# Altium PCB MGMEZZ04.PcbDoc (part 6 of 9)
Units mil, origin at the board's own origin, x right, y up, seen from the top; angles counter-clockwise.
Board outline 3790 x 5472.44 mil, 10 copper layers (TopLayer, InternalPlane1, MidLayer1, InternalPlane2, MidLayer2, MidLayer3, InternalPlane3, MidLayer4, InternalPlane4, BottomLayer), stack 57.08 mil thick; 846 components, 745 nets, 3323 pads, 1906 vias.
Unrouted connection lines stored in the file: 128.
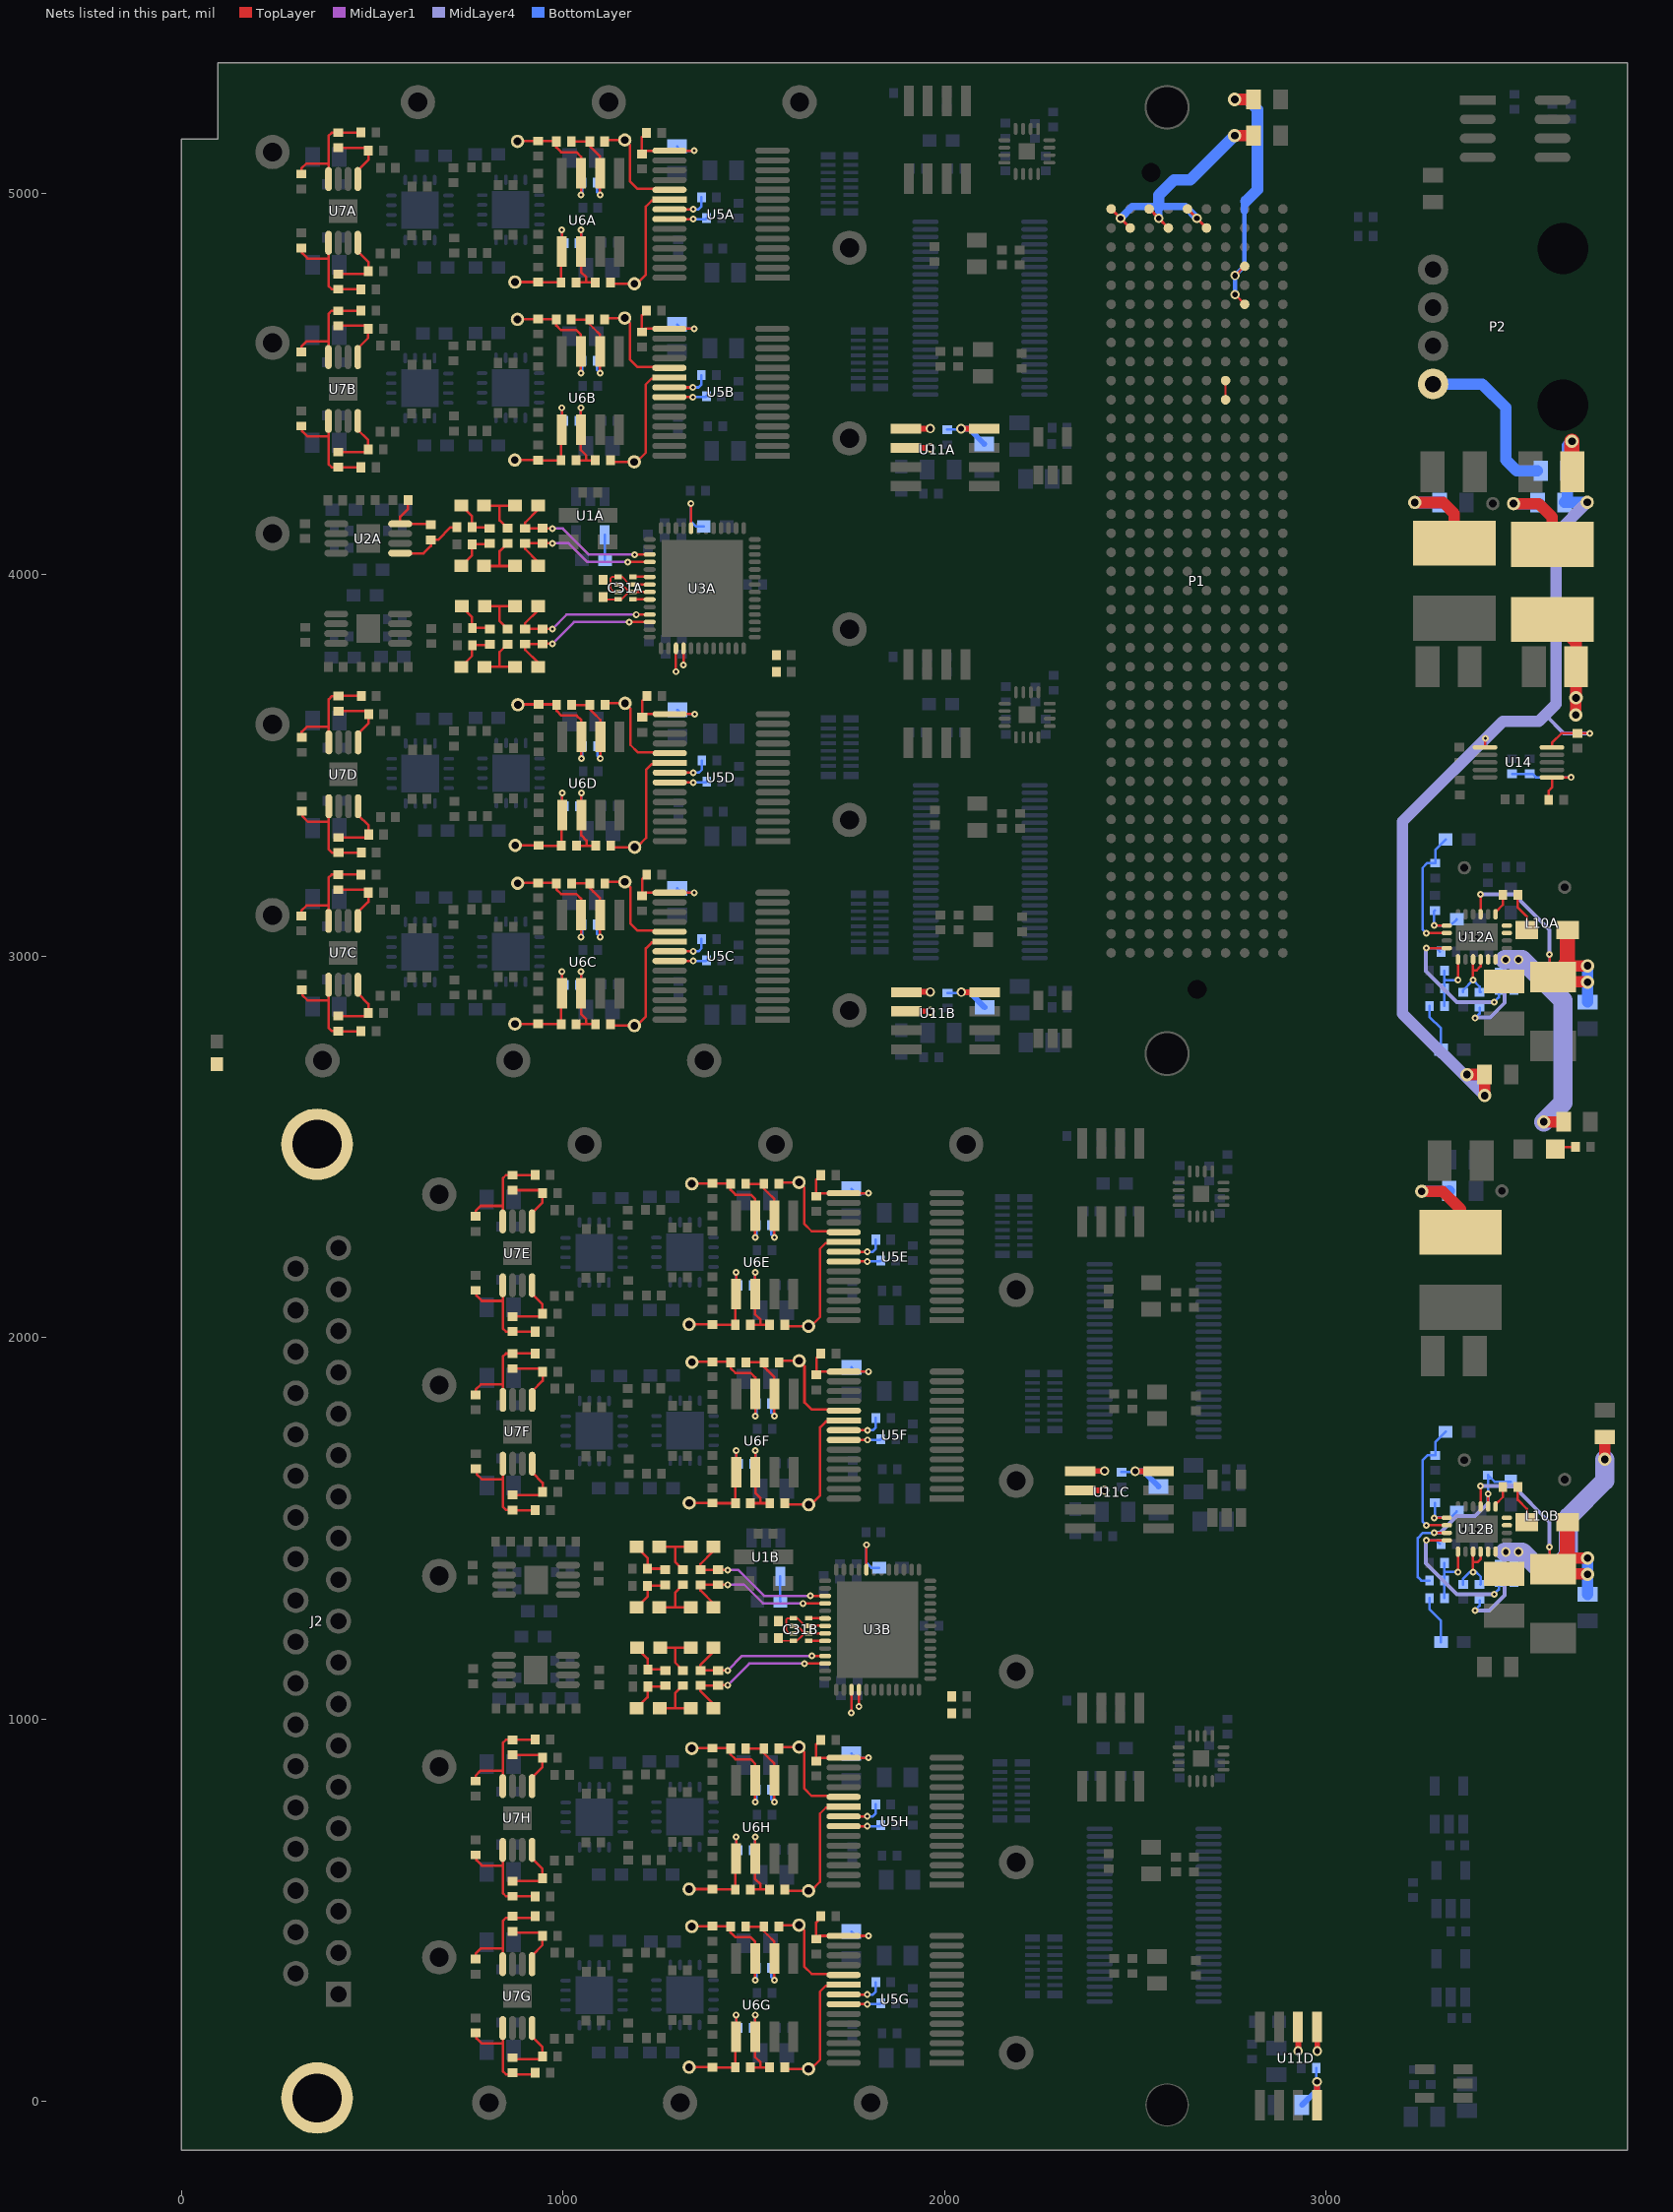
[diagram p14: the nets of this part, all layers, seen from the top]

## Via types
v1: diameter 18, hole 8, TopLayer to BottomLayer, 1296 vias
v2: diameter 18, hole 8, TopLayer to BottomLayer, tented both sides, 203 vias
v3: diameter 19.68, hole 7.87, TopLayer to BottomLayer, 188 vias
v4: diameter 25, hole 15, TopLayer to BottomLayer, tented both sides, 99 vias
v5: diameter 25, hole 15, TopLayer to BottomLayer, 72 vias
v6: diameter 35, hole 20, TopLayer to BottomLayer, 48 vias

## Nets (pads, with @x,y where several pads share a name; then routed paths per layer and width w, separated by ;. In a path a pad name is that pad's centre, name@x,y a point inside that pad or via, vN(x,y) a via of type N, cw(c..) or ccw(c..) an arc to the next point about the centre after c; other vN are vias at no path point) (continued)
N5V5FILT: C55A.2 C55B.2 C55C.2 C55D.2 C82.1 L13.1 R47A.2 R47B.2 R47C.2 R47D.2 U11A.1 U11A.2 U11A.8 U11B.1 U11B.2 U11B.8 U11C.1 U11C.2 U11C.8 U11D.1 U11D.2 U11D.8 | length 1510.9
  TopLayer w15: U11A.2@1899.38,4332.62 v5(1962.61,4332.62) ; U11A.1@1899.38,4383.19 v5(1962.61,4383.19) ; U11B.2@1900.19,2855.95 v5(1962.43,2855.95) ; U11B.1@1905.76,2906.53 v5@1964,2906.53 ; v5@2040.9,4382.62 U11A.8@2104.38,4382.62 ; v5(2043.96,2905.95) U11B.8@2105.19,2905.95 ; U11C.1@2355.88,1650.88 v5(2419.12,1650.88) ; U11C.2@2360.76,1600.31 v5@2419,1600.31 ; v5@2497.4,1650.31 U11C.8@2560.88,1650.31 ; v5@2927.28,129.91 U11D.2@2927.28,188.15 ; U11D.8@2976.14,-11.31 v5(2976.14,49.93) ; v5@2976.72,133.46 U11D.1@2976.72,196.69
  TopLayer w30: L13.1@3592.3,3883.15 3654.67,3820.78 C82.1@3654.67,3759.14 v6(3654.67,3677.26) ; v6@3654,3633.11 C82.1@3654,3714.99
  BottomLayer w6.5: R47A.2@2007,4380.37 v5@2043.9,4380.37 ; R47B.2@2007.81,2903.71 v5@2044.71,2903.71 ; v5@2040.9,4380.37 v5(2043.14,4382.62) ; R47C.2@2463.5,1648.06 v5@2497.4,1648.06 ; v5@2973.9,49.18 R47D.2@2973.9,86.07 ; v5@2973.9,52.18 v5(2976.14,49.93)
  BottomLayer w15: v5@2043.96,2903.71 2046.2,2905.95 2065.2,2905.95 C55B.2@2104.81,2866.34 ; v5@2046.14,4382.62 2064.38,4382.62 C55A.2@2104,4343 ; v5(2499.65,1650.31) 2520.89,1650.31 C55C.2@2560.5,1610.69 ; C55D.2@2936.53,-10.93 2976.14,28.69 v5(2976.14,49.93)
  other v5: 2926.14,130.46 2976.72,130.46 2419.12,1600.31 1962.43,2906.53
  other v6: 3654,3632.91
N5V5INT: C72.2 C81.1 In1.1 R49A.2 R75.1 R76.1 U14.5 U14.6 | length 2605.7
  TopLayer w6.5: U14.6@3416.39,3547.61 3416.39,3569.87 v1(3417.5,3570.98) ; U14.5@3591.58,3547.61 3591.58,3559.56 3616.59,3584.57 C72.2@3658,3584.57 v1(3690.43,3584.57)
  TopLayer w30: v6(3369,2690) R49A.2@3415,2690 v6(3415,2635)
  TopLayer w40: v6(3644,4350) 3644,4271.42 C81.1@3645.43,4269.99
  MidLayer4 w10: v1(3417.5,3570.98) 3431.08,3584.57 ; 3574,3633 3622.43,3584.57 v1(3690.43,3584.57)
  MidLayer4 w30: v6(3415,2635) 3200.16,2849.84 3200.16,3353.16 3463,3616 3557,3616 3602,3661 3602,4108 In1.1@3684,4190
  BottomLayer w30: R76.1@3624.42,4189.57 3632.42,4197.57 R75.1@3632.42,4272.57 ; R76.1@3632.42,4189.57 3632.85,4190 In1.1@3684,4190 ; R75.1@3635,4269.99 R75.1@3632.42,4272.57 ; v6(3644,4350) 3632.42,4338.42 R75.1@3632.42,4272.57
NEGSUPPLY: P2.4 R75.2 | length 456.6
  BottomLayer w30: P2.4@3280,4500 3409.19,4500 3471,4438.19 3471,4321 ; 3471,4330 3471,4301 3499.43,4272.57 R75.2@3553,4272.57
NetAmpN1A_1: AmpN1A.1 C42A.1 R33A.2 R95A.2 U6A.1 | length 300.4
  TopLayer w6.5: AmpN1A.1@874.11,4767.28 R95A.2@929.11,4767.28 ; R95A.2@935.11,4767.28 R95A.2@929.11,4767.28 ; U6A.1@995.11,4845.5 R33A.2@995.11,4766.45 929.94,4766.45 R95A.2@929.11,4767.28 ; U6A.1@997.32,4847.29 v1(997.32,4904.29)
  BottomLayer w6.5: v1(997.32,4904.29) 997.32,4875.43 C42A.1@1003.11,4869.65
NetAmpN1B_1: AmpN1B.1 C42B.1 R33B.2 R95B.2 U6B.1 | length 300.4
  TopLayer w6.5: AmpN1B.1@873.86,4300.62 R95B.2@928.86,4300.62 ; R95B.2@934.86,4300.62 R95B.2@928.86,4300.62 ; U6B.1@994.86,4378.84 R33B.2@994.86,4299.79 929.69,4299.79 R95B.2@928.86,4300.62 ; U6B.1@997.08,4380.62 v1(997.08,4437.63)
  BottomLayer w6.5: v1(997.08,4437.63) 997.08,4408.77 C42B.1@1002.86,4402.99
NetAmpN1C_1: AmpN1C.1 C42C.1 R33C.2 R95C.2 U6C.1 | length 300.4
  TopLayer w6.5: AmpN1C.1@874.31,2822.65 R95C.2@929.31,2822.65 ; R95C.2@935.31,2822.65 R95C.2@929.31,2822.65 ; U6C.1@995.31,2900.87 R33C.2@995.31,2821.82 930.14,2821.82 R95C.2@929.31,2822.65 ; U6C.1@997.52,2902.66 v1(997.52,2959.66)
  BottomLayer w6.5: v1(997.52,2959.66) 997.52,2930.8 C42C.1@1003.31,2925.02
NetAmpN1D_1: AmpN1D.1 C42D.1 R33D.2 R95D.2 U6D.1 | length 300.4
  TopLayer w6.5: AmpN1D.1@874.92,3290.62 R95D.2@929.92,3290.62 ; R95D.2@935.92,3290.62 R95D.2@929.92,3290.62 ; U6D.1@995.92,3368.84 R33D.2@995.92,3289.79 930.75,3289.79 R95D.2@929.92,3290.62 ; U6D.1@998.14,3370.62 v1(998.14,3427.63)
  BottomLayer w6.5: v1(998.14,3427.63) 998.14,3398.77 C42D.1@1003.92,3392.99
NetAmpN1E_1: AmpN1E.1 C42E.1 R33E.2 R95E.2 U6E.1 | length 300.4
  TopLayer w6.5: AmpN1E.1@1330.61,2034.97 R95E.2@1385.61,2034.97 ; R95E.2@1391.61,2034.97 R95E.2@1385.61,2034.97 ; U6E.1@1451.61,2113.19 R33E.2@1451.61,2034.14 1386.44,2034.14 R95E.2@1385.61,2034.97 ; U6E.1@1453.83,2114.98 v1(1453.83,2171.98)
  BottomLayer w6.5: v1(1453.83,2171.98) 1453.83,2143.13 C42E.1@1459.61,2137.34
NetAmpN1F_1: AmpN1F.1 C42F.1 R33F.2 R95F.2 U6F.1 | length 300.4
  TopLayer w6.5: AmpN1F.1@1331,1567.26 R95F.2@1386,1567.26 ; R95F.2@1392,1567.26 R95F.2@1386,1567.26 ; U6F.1@1452,1645.48 R33F.2@1452,1566.43 1386.83,1566.43 R95F.2@1386,1567.26 ; U6F.1@1454.21,1647.27 v1(1454.21,1704.27)
  BottomLayer w6.5: v1(1454.21,1704.27) 1454.21,1675.42 C42F.1@1460,1669.63
NetAmpN1G_1: AmpN1G.1 C42G.1 R33G.2 R95G.2 U6G.1 | length 300.4
  TopLayer w6.5: AmpN1G.1@1330.61,88.26 R95G.2@1385.61,88.26 ; R95G.2@1391.61,88.26 R95G.2@1385.61,88.26 ; U6G.1@1451.61,166.48 R33G.2@1451.61,87.43 1386.44,87.43 R95G.2@1385.61,88.26 ; U6G.1@1453.83,168.27 v1(1453.83,225.27)
  BottomLayer w6.5: v1(1453.83,225.27) 1453.83,196.42 C42G.1@1459.61,190.63
NetAmpN1H_1: AmpN1H.1 C42H.1 R33H.2 R95H.2 U6H.1 | length 300.4
  TopLayer w6.5: AmpN1H.1@1330.61,554.97 R95H.2@1385.61,554.97 ; R95H.2@1391.61,554.97 R95H.2@1385.61,554.97 ; U6H.1@1451.61,633.19 R33H.2@1451.61,554.14 1386.44,554.14 R95H.2@1385.61,554.97 ; U6H.1@1453.83,634.98 v1(1453.83,691.98)
  BottomLayer w6.5: v1(1453.83,691.98) 1453.83,663.13 C42H.1@1459.61,657.34
NetAmpP1A_1: AmpP1A.1 C38A.1 R19A.2 R96A.2 U6A.7 | length 326.7
  TopLayer w6.5: AmpP1A.1@881.11,5136.02 882.11,5137.02 R96A.2@935.11,5137.02 981.37,5137.02 R19A.2@982.74,5135.65 982.74,5120.23 995.32,5107.65 1035.35,5107.65 1047.32,5095.68 U6A.7@1047.32,5052.29 v1(1047.32,4995.28)
  BottomLayer w6.5: v1(1047.32,4995.28) 1050.11,4998.07 C38A.1@1050.11,5027.65
NetAmpP1B_1: AmpP1B.1 C38B.1 R19B.2 R96B.2 U6B.7 | length 326.7
  TopLayer w6.5: AmpP1B.1@880.86,4669.36 881.86,4670.36 R96B.2@934.86,4670.36 981.12,4670.36 R19B.2@982.49,4668.99 982.49,4653.57 995.08,4640.99 1035.11,4640.99 1047.08,4629.02 U6B.7@1047.08,4585.62 v1(1047.08,4528.62)
  BottomLayer w6.5: v1(1047.08,4528.62) 1049.86,4531.41 C38B.1@1049.86,4560.99
NetAmpP1C_1: AmpP1C.1 C38C.1 R19C.2 R96C.2 U6C.7 | length 326.7
  TopLayer w6.5: AmpP1C.1@881.31,3191.39 882.31,3192.39 R96C.2@935.31,3192.39 981.57,3192.39 R19C.2@982.94,3191.02 982.94,3175.6 995.52,3163.02 1035.55,3163.02 1047.52,3151.05 U6C.7@1047.52,3107.66 v1(1047.52,3050.65)
  BottomLayer w6.5: v1(1047.52,3050.65) 1050.31,3053.44 C38C.1@1050.31,3083.02
NetAmpP1D_1: AmpP1D.1 C38D.1 R19D.2 R96D.2 U6D.7 | length 326.7
  TopLayer w6.5: AmpP1D.1@881.92,3659.36 882.92,3660.36 R96D.2@935.92,3660.36 982.18,3660.36 R19D.2@983.55,3658.99 983.55,3643.57 996.14,3630.99 1036.17,3630.99 1048.14,3619.02 U6D.7@1048.14,3575.62 v1(1048.14,3518.62)
  BottomLayer w6.5: v1(1048.14,3518.62) 1050.92,3521.41 C38D.1@1050.92,3550.99
NetAmpP1E_1: AmpP1E.1 C38E.1 R19E.2 R96E.2 U6E.7 | length 326.7
  TopLayer w6.5: AmpP1E.1@1337.61,2403.71 1338.61,2404.71 R96E.2@1391.61,2404.71 1437.87,2404.71 R19E.2@1439.24,2403.34 1439.24,2387.92 1451.83,2375.34 1491.86,2375.34 1503.83,2363.37 U6E.7@1503.83,2319.98 v1(1503.83,2262.97)
  BottomLayer w6.5: v1(1503.83,2262.97) 1506.61,2265.76 C38E.1@1506.61,2295.34
NetAmpP1F_1: AmpP1F.1 C38F.1 R19F.2 R96F.2 U6F.7 | length 326.7
  TopLayer w6.5: AmpP1F.1@1338,1936 1339,1937 R96F.2@1392,1937 1438.26,1937 R19F.2@1439.63,1935.63 1439.63,1920.21 1452.21,1907.63 1492.24,1907.63 1504.21,1895.66 U6F.7@1504.21,1852.27 v1(1504.21,1795.26)
  BottomLayer w6.5: v1(1504.21,1795.26) 1507,1798.05 C38F.1@1507,1827.63
NetAmpP1G_1: AmpP1G.1 C38G.1 R19G.2 R96G.2 U6G.7 | length 326.7
  TopLayer w6.5: AmpP1G.1@1337.61,457 1338.61,458 R96G.2@1391.61,458 1437.87,458 R19G.2@1439.24,456.63 1439.24,441.21 1451.83,428.63 1491.86,428.63 1503.83,416.66 U6G.7@1503.83,373.27 v1(1503.83,316.26)
  BottomLayer w6.5: v1(1503.83,316.26) 1506.61,319.05 C38G.1@1506.61,348.63
NetAmpP1H_1: AmpP1H.1 C38H.1 R19H.2 R96H.2 U6H.7 | length 326.7
  TopLayer w6.5: AmpP1H.1@1337.61,923.71 1338.61,924.71 R96H.2@1391.61,924.71 1437.87,924.71 R19H.2@1439.24,923.34 1439.24,907.92 1451.83,895.34 1491.86,895.34 1503.83,883.37 U6H.7@1503.83,839.98 v1(1503.83,782.97)
  BottomLayer w6.5: v1(1503.83,782.97) 1506.61,785.76 C38H.1@1506.61,815.34
NetC6A_2: C6A.2 U1A.4 | length 66.2
  BottomLayer w6.5: U1A.4@1109.61,4104.77 1109.61,4039.27 C6A.2@1110.11,4038.77
NetC6B_2: C6B.2 U1B.4 | length 66.2
  BottomLayer w6.5: U1B.4@1569.3,1375.12 1569.3,1309.62 C6B.2@1569.8,1309.12
NetC8A_1: C8A.1 U3A.17 | length 59.9
  TopLayer w6.5: v1@1296.18,3748.15 U3A.17@1296.18,3808.05
  other v1: 1296.18,3746.15
NetC8B_1: C8B.1 U3B.17 | length 59.9
  TopLayer w6.5: v1@1755.87,1018.5 U3B.17@1755.87,1078.4
  other v1: 1755.87,1016.5
NetC18A_1: C18A.1 U3A.18 | length 40.9
  TopLayer w6.5: v1@1315.86,3767.15 U3A.18@1315.86,3808.05
  other v1: 1315.86,3763.15
NetC18B_1: C18B.1 U3B.18 | length 40.9
  TopLayer w6.5: v1@1775.55,1037.5 U3B.18@1775.55,1078.4
  other v1: 1775.55,1033.5
NetC20A_1: C20A.1 L3A.1 R7A.2 | length 116.1
  TopLayer w6.5: L3A.1@733.25,4022.86 761.88,4051.49 761.88,4079.86 804.88,4079.86 C20A.1@807.88,4082.86
NetC20A_2: C20A.2 L1A.1 R2A.2 | length 116.1
  TopLayer w6.5: L1A.1@733.25,4181.49 761.88,4152.86 R2A.2@761.88,4124.49 804.88,4124.49 C20A.2@807.88,4121.49
NetC20B_1: C20B.1 L3B.1 R7B.2 | length 116.1
  TopLayer w6.5: L3B.1@1192.94,1293.21 1221.57,1321.84 1221.57,1350.21 1264.57,1350.21 C20B.1@1267.57,1353.21
NetC20B_2: C20B.2 L1B.1 R2B.2 | length 116.1
  TopLayer w6.5: L1B.1@1192.94,1451.84 1221.57,1423.21 R2B.2@1221.57,1394.84 1264.57,1394.84 C20B.2@1267.57,1391.84
NetC21A_1: C21A.1 L3A.2 L4A.1 | length 149.9
  TopLayer w6.5: L3A.2@793.25,4022.86 834.06,4022.86 ; C21A.1@854.88,4082.49 834.06,4061.67 834.06,4022.86 ; L4A.1@874.88,4022.86 834.06,4022.86
NetC21A_2: C21A.2 L1A.2 L2A.1 | length 149.9
  TopLayer w6.5: L1A.2@793.25,4181.49 834.06,4181.49 ; C21A.2@854.88,4121.86 834.06,4142.67 834.06,4181.49 ; L2A.1@874.88,4181.49 834.06,4181.49
NetC21B_1: C21B.1 L3B.2 L4B.1 | length 149.9
  TopLayer w6.5: L3B.2@1252.94,1293.21 1293.75,1293.21 ; C21B.1@1314.57,1352.84 1293.75,1332.02 1293.75,1293.21 ; L4B.1@1334.57,1293.21 1293.75,1293.21
NetC21B_2: C21B.2 L1B.2 L2B.1 | length 149.9
  TopLayer w6.5: L1B.2@1252.94,1451.84 1293.75,1451.84 ; C21B.2@1314.57,1392.21 1293.75,1413.02 1293.75,1451.84 ; L2B.1@1334.57,1451.84 1293.75,1451.84
NetC22A_1: C22A.1 L4A.2 R5A.1 U3A.4 | length 423.8
  TopLayer w6.5: L4A.2@934.88,4022.86 934.88,4033.52 900.88,4067.52 900.88,4082.86 901.25,4082.49 R5A.1@946.88,4082.49 v1(971.91,4082.49) v1@972.91,4082.49 ; v1(1169.31,4033.5) U3A.4@1229.11,4033.5
  MidLayer1 w6.5: v1(971.91,4082.49) 1015.51,4082.49 1064.5,4033.5 v1(1169.31,4033.5)
NetC22A_2: C22A.2 L2A.2 R5A.2 U3A.3 | length 431.6
  TopLayer w6.5: L2A.2@934.88,4181.49 934.88,4170.82 900.88,4136.82 C22A.2@900.88,4121.49 901.25,4121.86 R5A.2@946.88,4121.86 ; R5A.2@946.88,4121.05 v1(971.91,4121.05) v1@972.91,4121.05 ; v1(1188.31,4053.05) U3A.3@1229.11,4053.05
  MidLayer1 w6.5: v1(971.91,4121.05) 999.95,4121.05 1067.95,4053.05 v1(1188.31,4053.05)
NetC22B_1: C22B.1 L4B.2 R5B.1 U3B.4 | length 423.8
  TopLayer w6.5: L4B.2@1394.57,1293.21 1394.57,1303.88 1360.57,1337.88 1360.57,1353.21 1360.94,1352.84 R5B.1@1406.57,1352.84 v1@1432.6,1352.84 ; v1(1629,1303.85) U3B.4@1688.8,1303.85
  MidLayer1 w6.5: v1(1431.6,1352.84) 1475.2,1352.84 1524.19,1303.85 v1(1629,1303.85)
NetC22B_2: C22B.2 L2B.2 R5B.2 U3B.3 | length 431.6
  TopLayer w6.5: L2B.2@1394.57,1451.84 1394.57,1441.17 1360.57,1407.17 C22B.2@1360.57,1391.84 1360.94,1392.21 R5B.2@1406.57,1392.21 ; R5B.2@1406.57,1391.4 v1@1432.6,1391.4 ; v1(1648,1323.4) U3B.3@1688.8,1323.4
  MidLayer1 w6.5: v1(1431.6,1391.4) 1459.64,1391.4 1527.64,1323.4 v1(1648,1323.4)
NetC25A_1: C25A.1 L7A.1 R15A.2 | length 116.1
  TopLayer w6.5: L7A.1@733.25,3758.86 761.88,3787.49 761.88,3815.86 804.88,3815.86 C25A.1@807.88,3818.86
NetC25A_2: C25A.2 L5A.1 R10A.2 | length 116.1
  TopLayer w6.5: L5A.1@733.25,3917.49 761.88,3888.86 761.88,3860.49 804.88,3860.49 C25A.2@807.88,3857.49
NetC25B_1: C25B.1 L7B.1 R15B.2 | length 116.1
  TopLayer w6.5: L7B.1@1192.94,1029.21 1221.57,1057.84 1221.57,1086.21 1264.57,1086.21 C25B.1@1267.57,1089.21
NetC25B_2: C25B.2 L5B.1 R10B.2 | length 116.1
  TopLayer w6.5: L5B.1@1192.94,1187.84 1221.57,1159.21 1221.57,1130.84 1264.57,1130.84 C25B.2@1267.57,1127.84
NetC26A_1: C26A.1 L7A.2 L8A.1 | length 149.9
  TopLayer w6.5: L7A.2@793.25,3758.86 834.06,3758.86 ; C26A.1@854.88,3818.49 834.06,3797.67 834.06,3758.86 ; L8A.1@874.88,3758.86 834.06,3758.86
NetC26A_2: C26A.2 L5A.2 L6A.1 | length 149.9
  TopLayer w6.5: L5A.2@793.25,3917.49 834.06,3917.49 ; C26A.2@854.88,3857.86 834.06,3878.67 834.06,3917.49 ; L6A.1@874.88,3917.49 834.06,3917.49
NetC26B_1: C26B.1 L7B.2 L8B.1 | length 149.9
  TopLayer w6.5: L7B.2@1252.94,1029.21 1293.75,1029.21 ; C26B.1@1314.57,1088.84 1293.75,1068.02 1293.75,1029.21 ; L8B.1@1334.57,1029.21 1293.75,1029.21
NetC26B_2: C26B.2 L5B.2 L6B.1 | length 149.9
  TopLayer w6.5: L5B.2@1252.94,1187.84 1293.75,1187.84 ; C26B.2@1314.57,1128.21 1293.75,1149.02 1293.75,1187.84 ; L6B.1@1334.57,1187.84 1293.75,1187.84
NetC27A_1: C27A.1 L8A.2 R13A.1 U3A.12 | length 425.1
  TopLayer w6.5: L8A.2@934.88,3758.86 934.88,3769.52 900.88,3803.52 900.88,3818.86 901.25,3818.49 R13A.1@946.88,3818.49 ; R13A.1@946.88,3819.29 v1(971.91,3819.29) v1@972.91,3819.29 ; v1(1173.31,3876.02) U3A.12@1227.28,3876.02
  MidLayer1 w6.5: v1(971.91,3819.29) 1028.64,3876.02 v1(1173.31,3876.02)
NetC27A_2: C27A.2 L6A.2 R13A.2 U3A.11 | length 417.3
  TopLayer w6.5: L6A.2@934.88,3917.49 934.88,3906.82 900.88,3872.82 900.88,3857.49 901.25,3857.86 R13A.2@946.88,3857.86 v1(971.91,3857.86) v1@972.91,3857.86 ; v1(1192.31,3895.7) U3A.11@1227.28,3895.7
  MidLayer1 w6.5: v1(971.91,3857.86) 1009.76,3895.7 v1(1192.31,3895.7)
NetC27B_1: C27B.1 L8B.2 R13B.1 U3B.12 | length 425.1
  TopLayer w6.5: L8B.2@1394.57,1029.21 1394.57,1039.88 1360.57,1073.88 1360.57,1089.21 1360.94,1088.84 R13B.1@1406.57,1088.84 ; R13B.1@1406.57,1089.64 v1@1432.6,1089.64 ; v1(1633,1146.37) U3B.12@1686.97,1146.37
  MidLayer1 w6.5: v1(1431.6,1089.64) 1488.33,1146.37 v1(1633,1146.37)
NetC27B_2: C27B.2 L6B.2 R13B.2 U3B.11 | length 417.3
  TopLayer w6.5: L6B.2@1394.57,1187.84 1394.57,1177.17 1360.57,1143.17 1360.57,1127.84 1360.94,1128.21 R13B.2@1406.57,1128.21 v1@1432.6,1128.21 ; v1(1652,1166.05) U3B.11@1686.97,1166.05
  MidLayer1 w6.5: v1(1431.6,1128.21) 1469.45,1166.05 v1(1652,1166.05)
NetC28A_1: C28A.1 U3A.48 | length 151
  TopLayer w6.5: U3A.48@1335.55,4122.08 v1(1335.55,4187.05)
  BottomLayer w6.5: v1(1335.55,4187.05) 1335.55,4139.85 1348.35,4127.05 C28A.1@1369.11,4127.05
NetC28B_1: C28B.1 U3B.48 | length 151
  TopLayer w6.5: U3B.48@1795.24,1392.43 v1(1795.24,1457.4)
  BottomLayer w6.5: v1(1795.24,1457.4) 1795.24,1410.2 1808.04,1397.4 C28B.1@1828.8,1397.4
NetC31A_1: C31A.1 U3A.6 | length 42.8
  TopLayer w6.5: C31A.1@1184.72,3994.6 1226.81,3994.6 U3A.6@1227.28,3994.13
NetC31A_2: C31A.2 C31A.3 C31A.6 C32A.2 U3A.7 | length 161.6
  TopLayer w5: C31A.6@1144.43,3955.21 1132.95,3955.21 1125.11,3963.05 1125.11,3991.05 1128.64,3994.58 C31A.2@1144.43,3994.58 1154.58,3994.58 1174.27,3974.89 C31A.3@1183.8,3974.89
  TopLayer w6.5: C31A.3@1184.72,3974.92 1226.81,3974.92 U3A.7@1227.28,3974.44
NetC31A_4: C31A.4 C31A.5 C31A.8 C33A.2 U3A.8 | length 170.6
  TopLayer w5: C33A.2@1105.11,3942.05 1111.64,3935.52 C31A.8@1144.43,3935.52 1153.58,3935.52 1168.11,3950.05 1168.11,3961.05 1154.27,3974.89 C31A.4@1144.43,3974.89 ; 1168.11,3955.21 C31A.5@1183.8,3955.21
  TopLayer w6.5: C31A.5@1184.72,3955.23 1226.81,3955.23 U3A.8@1227.28,3954.76
NetC31A_7: C31A.7 U3A.9 | length 42.8
  TopLayer w6.5: C31A.7@1184.72,3935.55 1226.81,3935.55 U3A.9@1227.28,3935.07
NetC31B_1: C31B.1 U3B.6 | length 42.8
  TopLayer w6.5: C31B.1@1644.41,1264.95 1686.5,1264.95 U3B.6@1686.97,1264.48
NetC31B_2: C31B.2 C31B.3 C31B.6 C32B.2 U3B.7 | length 161.6
  TopLayer w5: C31B.6@1604.12,1225.56 1592.64,1225.56 1584.8,1233.4 1584.8,1261.4 1588.33,1264.93 C31B.2@1604.12,1264.93 1614.27,1264.93 1633.96,1245.25 C31B.3@1643.49,1245.25
  TopLayer w6.5: C31B.3@1644.41,1245.27 1686.5,1245.27 U3B.7@1686.97,1244.8
NetC31B_4: C31B.4 C31B.5 C31B.8 C33B.2 U3B.8 | length 170.6
  TopLayer w5: C33B.2@1564.8,1212.4 1571.33,1205.88 C31B.8@1604.12,1205.88 1613.27,1205.88 1627.8,1220.4 1627.8,1231.4 1613.96,1245.25 C31B.4@1604.12,1245.25 ; 1627.8,1225.56 C31B.5@1643.49,1225.56
  TopLayer w6.5: C31B.5@1644.41,1225.58 1686.5,1225.58 U3B.8@1686.97,1225.11
NetC31B_7: C31B.7 U3B.9 | length 42.8
  TopLayer w6.5: C31B.7@1644.41,1205.9 1686.5,1205.9 U3B.9@1686.97,1205.43
NetC36A_1: C36A.1 U5A.22 | length 98
  TopLayer w6.5: U5A.22@1279.11,4932.25 v1(1340.94,4932.25)
  BottomLayer w6.5: v1(1340.94,4932.25) 1373.71,4932.25 C36A.1@1376.11,4934.65
NetC36B_1: C36B.1 U5B.22 | length 98
  TopLayer w6.5: U5B.22@1278.86,4465.59 v1(1340.69,4465.59)
  BottomLayer w6.5: v1(1340.69,4465.59) 1373.46,4465.59 C36B.1@1375.86,4467.99
NetC36C_1: C36C.1 U5C.22 | length 98
  TopLayer w6.5: U5C.22@1279.31,2987.62 v1(1341.14,2987.62)
  BottomLayer w6.5: v1(1341.14,2987.62) 1373.91,2987.62 C36C.1@1376.31,2990.02
NetC36D_1: C36D.1 U5D.22 | length 98
  TopLayer w6.5: U5D.22@1279.92,3455.59 v1(1341.75,3455.59)
  BottomLayer w6.5: v1(1341.75,3455.59) 1374.52,3455.59 C36D.1@1376.92,3457.99
NetC36E_1: C36E.1 U5E.22 | length 98
  TopLayer w6.5: U5E.22@1735.61,2199.94 v1(1797.44,2199.94)
  BottomLayer w6.5: v1(1797.44,2199.94) 1830.21,2199.94 C36E.1@1832.61,2202.34
NetC36F_1: C36F.1 U5F.22 | length 98
  TopLayer w6.5: U5F.22@1736,1732.23 v1(1797.83,1732.23)
  BottomLayer w6.5: v1(1797.83,1732.23) 1830.6,1732.23 C36F.1@1833,1734.63
NetC36G_1: C36G.1 U5G.22 | length 98
  TopLayer w6.5: U5G.22@1735.61,253.23 v1(1797.44,253.23)
  BottomLayer w6.5: v1(1797.44,253.23) 1830.21,253.23 C36G.1@1832.61,255.63
NetC36H_1: C36H.1 U5H.22 | length 98
  TopLayer w6.5: U5H.22@1735.61,719.94 v1(1797.44,719.94)
  BottomLayer w6.5: v1(1797.44,719.94) 1830.21,719.94 C36H.1@1832.61,722.34
NetC37A_1: C37A.1 U5A.21 | length 111.2
  TopLayer w6.5: U5A.21@1279.11,4957.85 v1(1340.94,4957.85)
  BottomLayer w6.5: v1(1340.94,4957.85) 1355.31,4957.85 1363.11,4965.65 C37A.1@1363.11,4989.65
NetC37B_1: C37B.1 U5B.21 | length 111.2
  TopLayer w6.5: U5B.21@1278.86,4491.19 v1(1340.69,4491.19)
  BottomLayer w6.5: v1(1340.69,4491.19) 1355.06,4491.19 1362.86,4498.99 C37B.1@1362.86,4522.99
NetC37C_1: C37C.1 U5C.21 | length 111.2
  TopLayer w6.5: U5C.21@1279.31,3013.22 v1(1341.14,3013.22)
  BottomLayer w6.5: v1(1341.14,3013.22) 1355.51,3013.22 1363.31,3021.02 C37C.1@1363.31,3045.02
NetC37D_1: C37D.1 U5D.21 | length 111.2
  TopLayer w6.5: U5D.21@1279.92,3481.19 v1(1341.75,3481.19)
  BottomLayer w6.5: v1(1341.75,3481.19) 1356.12,3481.19 1363.92,3488.99 C37D.1@1363.92,3512.99
NetC37E_1: C37E.1 U5E.21 | length 111.2
  TopLayer w6.5: U5E.21@1735.61,2225.54 v1(1797.44,2225.54)
  BottomLayer w6.5: v1(1797.44,2225.54) 1811.81,2225.54 1819.61,2233.34 C37E.1@1819.61,2257.34
NetC37F_1: C37F.1 U5F.21 | length 111.2
  TopLayer w6.5: U5F.21@1736,1757.83 v1(1797.83,1757.83)
  BottomLayer w6.5: v1(1797.83,1757.83) 1812.2,1757.83 1820,1765.63 C37F.1@1820,1789.63
NetC37G_1: C37G.1 U5G.21 | length 111.2
  TopLayer w6.5: U5G.21@1735.61,278.83 v1(1797.44,278.83)
  BottomLayer w6.5: v1(1797.44,278.83) 1811.81,278.83 1819.61,286.63 C37G.1@1819.61,310.63
NetC37H_1: C37H.1 U5H.21 | length 111.2
  TopLayer w6.5: U5H.21@1735.61,745.54 v1(1797.44,745.54)
  BottomLayer w6.5: v1(1797.44,745.54) 1811.81,745.54 1819.61,753.34 C37H.1@1819.61,777.34
NetC38A_2: C38A.2 R19A.1 R22A.1 U6A.6 | length 227.3
  TopLayer w6.5: R19A.1@1030.11,5135.65 R22A.1@1070.11,5135.65 1070.11,5123.65 1079.11,5114.65 1097.32,5096.43 U6A.6@1097.32,5052.29 v1(1097.32,4995.28)
  BottomLayer w6.5: C38A.2@1089.48,5027.65 1089.48,5003.12 v1(1097.32,4995.28)
NetC38B_2: C38B.2 R19B.1 R22B.1 U6B.6 | length 227.3
  TopLayer w6.5: R19B.1@1029.86,4668.99 R22B.1@1069.86,4668.99 1069.86,4656.99 1078.86,4647.99 1097.08,4629.77 U6B.6@1097.08,4585.62 v1(1097.08,4528.62)
  BottomLayer w6.5: C38B.2@1089.23,4560.99 1089.23,4536.46 v1(1097.08,4528.62)
NetC38C_2: C38C.2 R19C.1 R22C.1 U6C.6 | length 227.3
  TopLayer w6.5: R19C.1@1030.31,3191.02 R22C.1@1070.31,3191.02 1070.31,3179.02 1079.31,3170.02 1097.52,3151.8 U6C.6@1097.52,3107.66 v1(1097.52,3050.65)
  BottomLayer w6.5: C38C.2@1089.68,3083.02 1089.68,3058.49 v1(1097.52,3050.65)
NetC38D_2: C38D.2 R19D.1 R22D.1 U6D.6 | length 227.3
  TopLayer w6.5: R19D.1@1030.92,3658.99 R22D.1@1070.92,3658.99 1070.92,3646.99 1079.92,3637.99 1098.14,3619.77 U6D.6@1098.14,3575.62 v1(1098.14,3518.62)
  BottomLayer w6.5: C38D.2@1090.29,3550.99 1090.29,3526.46 v1(1098.14,3518.62)
NetC38E_2: C38E.2 R19E.1 R22E.1 U6E.6 | length 227.3
  TopLayer w6.5: R19E.1@1486.61,2403.34 R22E.1@1526.61,2403.34 1526.61,2391.34 1535.61,2382.34 1553.83,2364.13 U6E.6@1553.83,2319.98 v1(1553.83,2262.97)
  BottomLayer w6.5: C38E.2@1545.98,2295.34 1545.98,2270.81 v1(1553.83,2262.97)
NetC38F_2: C38F.2 R19F.1 R22F.1 U6F.6 | length 227.3
  TopLayer w6.5: R19F.1@1487,1935.63 R22F.1@1527,1935.63 1527,1923.63 1536,1914.63 1554.21,1896.42 U6F.6@1554.21,1852.27 v1(1554.21,1795.26)
  BottomLayer w6.5: C38F.2@1546.37,1827.63 1546.37,1803.11 v1(1554.21,1795.26)
NetC38G_2: C38G.2 R19G.1 R22G.1 U6G.6 | length 227.3
  TopLayer w6.5: R19G.1@1486.61,456.63 R22G.1@1526.61,456.63 1526.61,444.63 1535.61,435.63 1553.83,417.42 U6G.6@1553.83,373.27 v1(1553.83,316.26)
  BottomLayer w6.5: C38G.2@1545.98,348.63 1545.98,324.11 v1(1553.83,316.26)
NetC38H_2: C38H.2 R19H.1 R22H.1 U6H.6 | length 227.3
  TopLayer w6.5: R19H.1@1486.61,923.34 R22H.1@1526.61,923.34 1526.61,911.34 1535.61,902.34 1553.83,884.13 U6H.6@1553.83,839.98 v1(1553.83,782.97)
  BottomLayer w6.5: C38H.2@1545.98,815.34 1545.98,790.81 v1(1553.83,782.97)
NetC39A_1: C39A.1 R18A.2 R24A.1 U7A.4 | length 292.3
  TopLayer w6.5: R24A.1@314.75,5050.52 314.75,5064.75 328,5078 385.72,5078 ; U7A.4@385.72,5037.31 385.72,5078 ; R18A.2@470.63,5159 411.42,5159 C39A.1@411.07,5158.65 393.97,5158.65 385.72,5150.4 385.72,5078
NetC39A_2: C39A.2 R23A.2 U7A.1 | length 167.7
  TopLayer w6.5: C39A.2@411.07,5119.28 482.17,5119.28 R23A.2@490,5111.45 490,5087.54 462.5,5060.03 U7A.1@462.5,5037.31
NetC39B_1: C39B.1 R18B.2 R24B.1 U7B.4 | length 292.3
  TopLayer w6.5: R24B.1@314.51,4583.86 314.51,4598.09 327.75,4611.34 385.48,4611.34 ; U7B.4@385.48,4570.65 385.48,4611.34 ; R18B.2@470.38,4692.34 411.17,4692.34 C39B.1@410.82,4691.99 393.72,4691.99 385.48,4683.74 385.48,4611.34
NetC39B_2: C39B.2 R23B.2 U7B.1 | length 167.7
  TopLayer w6.5: C39B.2@410.82,4652.62 481.92,4652.62 R23B.2@489.75,4644.79 489.75,4620.88 462.25,4593.37 U7B.1@462.25,4570.65
NetC39C_1: C39C.1 R18C.2 R24C.1 U7C.4 | length 292.3
  TopLayer w6.5: R24C.1@314.95,3105.89 314.95,3120.12 328.2,3133.37 385.92,3133.37 ; U7C.4@385.92,3092.68 385.92,3133.37 ; R18C.2@470.83,3214.37 411.62,3214.37 C39C.1@411.27,3214.02 394.17,3214.02 385.92,3205.77 385.92,3133.37
NetC39C_2: C39C.2 R23C.2 U7C.1 | length 167.7
  TopLayer w6.5: C39C.2@411.27,3174.65 482.37,3174.65 R23C.2@490.2,3166.82 490.2,3142.91 462.7,3115.4 U7C.1@462.7,3092.68
NetC39D_1: C39D.1 R18D.2 R24D.1 U7D.4 | length 292.3
  TopLayer w6.5: R24D.1@315.57,3573.86 315.57,3588.09 328.81,3601.34 386.54,3601.34 ; U7D.4@386.54,3560.65 386.54,3601.34 ; R18D.2@471.44,3682.34 412.24,3682.34 C39D.1@411.88,3681.99 394.78,3681.99 386.54,3673.74 386.54,3601.34
NetC39D_2: C39D.2 R23D.2 U7D.1 | length 167.7
  TopLayer w6.5: C39D.2@411.88,3642.62 482.98,3642.62 R23D.2@490.81,3634.79 490.81,3610.88 463.31,3583.37 U7D.1@463.31,3560.65
NetC39E_1: C39E.1 R18E.2 R24E.1 U7E.4 | length 292.3
  TopLayer w6.5: R24E.1@771.26,2318.21 771.26,2332.44 784.5,2345.69 842.23,2345.69 ; U7E.4@842.23,2305 842.23,2345.69 ; R18E.2@927.13,2426.69 867.93,2426.69 C39E.1@867.57,2426.34 850.47,2426.34 842.23,2418.09 842.23,2345.69
NetC39E_2: C39E.2 R23E.2 U7E.1 | length 167.7
  TopLayer w6.5: C39E.2@867.57,2386.97 938.67,2386.97 R23E.2@946.5,2379.14 946.5,2355.23 919,2327.72 U7E.1@919,2305
NetC39F_1: C39F.1 R18F.2 R24F.1 U7F.4 | length 292.3
  TopLayer w6.5: R24F.1@771.64,1850.5 771.64,1864.74 784.89,1877.98 842.61,1877.98 ; U7F.4@842.61,1837.29 842.61,1877.98 ; R18F.2@927.52,1958.98 868.31,1958.98 C39F.1@867.96,1958.63 850.86,1958.63 842.61,1950.39 842.61,1877.98
NetC39F_2: C39F.2 R23F.2 U7F.1 | length 167.7
  TopLayer w6.5: C39F.2@867.96,1919.26 939.06,1919.26 R23F.2@946.89,1911.43 946.89,1887.52 919.39,1860.02 U7F.1@919.39,1837.29
NetC39G_1: C39G.1 R18G.2 R24G.1 U7G.4 | length 292.3
  TopLayer w6.5: R24G.1@771.26,371.5 771.26,385.74 784.5,398.98 842.23,398.98 ; U7G.4@842.23,358.29 842.23,398.98 ; R18G.2@927.13,479.98 867.93,479.98 867.57,479.63 850.47,479.63 842.23,471.39 842.23,398.98
NetC39G_2: C39G.2 R23G.2 U7G.1 | length 167.7
  TopLayer w6.5: C39G.2@867.57,440.26 938.67,440.26 R23G.2@946.5,432.43 946.5,408.52 919,381.02 U7G.1@919,358.29
NetC39H_1: C39H.1 R18H.2 R24H.1 U7H.4 | length 292.3
  TopLayer w6.5: R24H.1@771.26,838.21 771.26,852.44 784.5,865.69 842.23,865.69 ; U7H.4@842.23,825 842.23,865.69 ; R18H.2@927.13,946.69 867.93,946.69 C39H.1@867.57,946.34 850.47,946.34 842.23,938.09 842.23,865.69
NetC39H_2: C39H.2 R23H.2 U7H.1 | length 167.7
  TopLayer w6.5: C39H.2@867.57,906.97 938.67,906.97 R23H.2@946.5,899.14 946.5,875.23 919,847.72 U7H.1@919,825
NetC41A_1: C41A.1 R29A.1 R35A.2 U7A.5 | length 283.1
  TopLayer w6.5: R29A.1@317,4850 317,4843 331,4829 385.72,4829 ; U7A.5@385.72,4869.99 385.72,4829 ; R35A.2@470.63,4748.3 411.42,4748.3 C41A.1@411.07,4748.65 393.97,4748.65 385.72,4756.89 385.72,4829
NetC41A_2: C41A.2 R26A.2 U7A.8 | length 145
  TopLayer w6.5: C41A.2@411.07,4788.02 482.17,4788.02 R26A.2@490,4795.85 490,4819.76 U7A.8@462.5,4847.26
NetC41B_1: C41B.1 R29B.1 R35B.2 U7B.5 | length 283.1
  TopLayer w6.5: R29B.1@316.75,4383.34 316.75,4376.34 330.75,4362.34 385.48,4362.34 ; U7B.5@385.48,4403.32 385.48,4362.34 ; R35B.2@470.38,4281.63 411.17,4281.63 C41B.1@410.82,4281.99 393.72,4281.99 385.48,4290.23 385.48,4362.34
NetC41B_2: C41B.2 R26B.2 U7B.8 | length 145
  TopLayer w6.5: C41B.2@410.82,4321.36 481.92,4321.36 R26B.2@489.75,4329.19 489.75,4353.1 U7B.8@462.25,4380.6
NetC41C_1: C41C.1 R29C.1 R35C.2 U7C.5 | length 283.1
  TopLayer w6.5: R29C.1@317.2,2905.37 317.2,2898.37 331.2,2884.37 385.92,2884.37 ; U7C.5@385.92,2925.36 385.92,2884.37 ; R35C.2@470.83,2803.67 411.62,2803.67 C41C.1@411.27,2804.02 394.17,2804.02 385.92,2812.26 385.92,2884.37
NetC41C_2: C41C.2 R26C.2 U7C.8 | length 145
  TopLayer w6.5: C41C.2@411.27,2843.39 482.37,2843.39 R26C.2@490.2,2851.22 490.2,2875.13 U7C.8@462.7,2902.63
NetC41D_1: C41D.1 R29D.1 R35D.2 U7D.5 | length 283.1
  TopLayer w6.5: R29D.1@317.81,3373.34 317.81,3366.34 331.81,3352.34 386.54,3352.34 ; U7D.5@386.54,3393.32 386.54,3352.34 ; R35D.2@471.44,3271.63 412.24,3271.63 C41D.1@411.88,3271.99 394.78,3271.99 386.54,3280.23 386.54,3352.34
NetC41D_2: C41D.2 R26D.2 U7D.8 | length 145
  TopLayer w6.5: C41D.2@411.88,3311.36 482.98,3311.36 R26D.2@490.81,3319.19 490.81,3343.1 U7D.8@463.31,3370.6
NetC41E_1: C41E.1 R29E.1 R35E.2 U7E.5 | length 283.1
  TopLayer w6.5: R29E.1@773.5,2117.69 773.5,2110.69 787.5,2096.69 842.23,2096.69 ; U7E.5@842.23,2137.68 842.23,2096.69 ; R35E.2@927.13,2015.99 867.93,2015.99 C41E.1@867.57,2016.34 850.47,2016.34 842.23,2024.58 842.23,2096.69
NetC41E_2: C41E.2 R26E.2 U7E.8 | length 145
  TopLayer w6.5: C41E.2@867.57,2055.71 938.67,2055.71 R26E.2@946.5,2063.54 946.5,2087.45 U7E.8@919,2114.95
NetC41F_1: C41F.1 R29F.1 R35F.2 U7F.5 | length 283.1
  TopLayer w6.5: R29F.1@773.89,1649.98 773.89,1642.98 787.89,1628.98 842.61,1628.98 ; U7F.5@842.61,1669.97 842.61,1628.98 ; R35F.2@927.52,1548.28 868.31,1548.28 C41F.1@867.96,1548.63 850.86,1548.63 842.61,1556.87 842.61,1628.98
NetC41F_2: C41F.2 R26F.2 U7F.8 | length 145
  TopLayer w6.5: C41F.2@867.96,1588 939.06,1588 R26F.2@946.89,1595.83 946.89,1619.74 U7F.8@919.39,1647.24
NetC41G_1: C41G.1 R29G.1 R35G.2 U7G.5 | length 283.1
  TopLayer w6.5: R29G.1@773.5,170.98 773.5,163.98 787.5,149.98 842.23,149.98 ; U7G.5@842.23,190.97 842.23,149.98 ; R35G.2@927.13,69.28 867.93,69.28 867.57,69.63 850.47,69.63 842.23,77.87 842.23,149.98
NetC41G_2: C41G.2 R26G.2 U7G.8 | length 145
  TopLayer w6.5: C41G.2@867.57,109 938.67,109 R26G.2@946.5,116.83 946.5,140.74 U7G.8@919,168.24
NetC41H_1: C41H.1 R29H.1 R35H.2 U7H.5 | length 283.1
  TopLayer w6.5: R29H.1@773.5,637.69 773.5,630.69 787.5,616.69 842.23,616.69 ; U7H.5@842.23,657.68 842.23,616.69 ; R35H.2@927.13,535.99 867.93,535.99 C41H.1@867.57,536.34 850.47,536.34 842.23,544.58 842.23,616.69
NetC41H_2: C41H.2 R26H.2 U7H.8 | length 145
  TopLayer w6.5: C41H.2@867.57,575.71 938.67,575.71 R26H.2@946.5,583.54 946.5,607.45 U7H.8@919,634.95
NetC42A_2: C42A.2 R30A.2 R33A.1 U6A.2 | length 230.8
  TopLayer w6.5: R33A.1@1034.48,4766.45 1061.11,4766.45 ; v1(1047.32,4904.29) U6A.2@1047.32,4847.29 1047.32,4793.43 1061.11,4779.65 1061.11,4766.45 ; R30A.2@1085.11,4766.45 1061.11,4766.45
  BottomLayer w6.5: C42A.2@1042.48,4869.65 1047.32,4874.49 v1(1047.32,4904.29)
NetC42B_2: C42B.2 R30B.2 R33B.1 U6B.2 | length 230.8
  TopLayer w6.5: R33B.1@1034.23,4299.79 1060.86,4299.79 ; v1(1047.08,4437.63) U6B.2@1047.08,4380.62 1047.08,4326.77 1060.86,4312.99 1060.86,4299.79 ; R30B.2@1084.86,4299.79 1060.86,4299.79
  BottomLayer w6.5: C42B.2@1042.23,4402.99 1047.08,4407.83 v1(1047.08,4437.63)
NetC42C_2: C42C.2 R30C.2 R33C.1 U6C.2 | length 230.8
  TopLayer w6.5: R33C.1@1034.68,2821.82 1061.31,2821.82 ; v1(1047.52,2959.66) U6C.2@1047.52,2902.66 1047.52,2848.8 1061.31,2835.02 1061.31,2821.82 ; R30C.2@1085.31,2821.82 1061.31,2821.82
  BottomLayer w6.5: C42C.2@1042.68,2925.02 1047.52,2929.86 v1(1047.52,2959.66)
NetC42D_2: C42D.2 R30D.2 R33D.1 U6D.2 | length 230.8
  TopLayer w6.5: R33D.1@1035.29,3289.79 1061.92,3289.79 ; v1(1048.14,3427.63) U6D.2@1048.14,3370.62 1048.14,3316.77 1061.92,3302.99 1061.92,3289.79 ; R30D.2@1085.92,3289.79 1061.92,3289.79
  BottomLayer w6.5: C42D.2@1043.29,3392.99 1048.14,3397.83 v1(1048.14,3427.63)
NetC42E_2: C42E.2 R30E.2 R33E.1 U6E.2 | length 230.8
  TopLayer w6.5: R33E.1@1490.98,2034.14 1517.61,2034.14 ; v1(1503.83,2171.98) U6E.2@1503.83,2114.98 1503.83,2061.13 1517.61,2047.34 1517.61,2034.14 ; R30E.2@1541.61,2034.14 1517.61,2034.14
  BottomLayer w6.5: C42E.2@1498.98,2137.34 1503.83,2142.18 v1(1503.83,2171.98)
NetC42F_2: C42F.2 R30F.2 R33F.1 U6F.2 | length 230.8
  TopLayer w6.5: R33F.1@1491.37,1566.43 1518,1566.43 ; v1(1504.21,1704.27) U6F.2@1504.21,1647.27 1504.21,1593.42 1518,1579.63 1518,1566.43 ; R30F.2@1542,1566.43 1518,1566.43
  BottomLayer w6.5: C42F.2@1499.37,1669.63 1504.21,1674.47 v1(1504.21,1704.27)
NetC42G_2: C42G.2 R30G.2 R33G.1 U6G.2 | length 230.8
  TopLayer w6.5: R33G.1@1490.98,87.43 1517.61,87.43 ; v1(1503.83,225.27) U6G.2@1503.83,168.27 1503.83,114.42 1517.61,100.63 1517.61,87.43 ; R30G.2@1541.61,87.43 1517.61,87.43
  BottomLayer w6.5: C42G.2@1498.98,190.63 1503.83,195.47 v1(1503.83,225.27)
NetC42H_2: C42H.2 R30H.2 R33H.1 U6H.2 | length 230.8
  TopLayer w6.5: R33H.1@1490.98,554.14 1517.61,554.14 ; v1(1503.83,691.98) U6H.2@1503.83,634.98 1503.83,581.13 1517.61,567.34 1517.61,554.14 ; R30H.2@1541.61,554.14 1517.61,554.14
  BottomLayer w6.5: C42H.2@1498.98,657.34 1503.83,662.18 v1(1503.83,691.98)
NetC56A_1: C56A.1 R50A.1 R58A.1 U12A.15 U12A.16 | length 866.3
  TopLayer w30: v6(3570.35,2566) R58A.1@3622,2566
  MidLayer4 w10: v1@3390,2840 3430,2840 3467.99,2877.99 3467.99,2974.02 3451.01,2991.01 3467.99,2991.01 3480,2979
  MidLayer4 w50: v5@3467.99,2991.01 3500.99,2991.01 3513.7,2991.01 3620,2884.7 3620,2615.65 v6(3570.35,2566)
  BottomLayer w6.5: v1(3390,2838) 3401.99,2849.99 R50A.1@3401.99,2864.58
  other v5: 3469.99,2991.01 3503.99,2991.01
NetC56B_1: C56B.1 R50B.1 R58B.1 U12B.15 U12B.16 | length 816
  TopLayer w30: v6(3730,1681.35) R58B.1@3730,1722
  MidLayer4 w10: v1(3390,1285.62) 3428,1285.62 3467.99,1325.61 3467.99,1421.65 3451.01,1438.63 3467.99,1438.63 3480,1426.62 ; v1@3390,1287.62 v1@3393.62,1284
  MidLayer4 w50: v5@3467.99,1438.63 3513.7,1438.63 3557.33,1395 3599.62,1395 3635,1430.38 3635,1530.57 3730,1625.57 v6(3730,1681.35)
  BottomLayer w6.5: v1(3390,1285.62) 3401.99,1297.61 R50B.1@3401.99,1312.21
  other v5: 3470.99,1438.63 3503.99,1438.63
NetC57A_1: C57A.1 L10A.1 U12A.19 U12A.20 | length 101.8
  TopLayer w6.5: C57A.1@3502.36,3161.01 3502.36,3127.64 3525.99,3104.01 L10A.1@3525.99,3069.01
NetC57A_2: C57A.2 U12A.1 | length 58.8
  TopLayer w6.5: U12A.1@3443.99,3110.12 3443.99,3116 3462.99,3135 C57A.2@3462.99,3161.01
NetC57B_1: C57B.1 L10B.1 U12B.19 U12B.20 | length 101.8
  TopLayer w6.5: C57B.1@3502.36,1608.63 3502.36,1575.26 3525.99,1551.63 L10B.1@3525.99,1516.63
NetC57B_2: C57B.2 U12B.1 | length 58.8
  TopLayer w6.5: U12B.1@3443.99,1557.74 3443.99,1563.62 3462.99,1582.62 C57B.2@3462.99,1608.63
NetC59A_2: C59A.2 R50A.2 U12A.13 U12A.14 | length 176.8
  TopLayer w6.5: v1(3384.94,2937.49) 3384.94,2961 ; U12A.13@3384.94,2992.01 3384.94,2963 3394,2963 3404.62,2973.62 U12A.14@3404.62,2992.01
  BottomLayer w6.5: C59A.2@3358.87,2905.95 3358.87,2911.42 v1(3384.94,2937.49) 3401.99,2920.43 R50A.2@3401.99,2905.95 ; R50A.2@3404.36,2905.95 R50A.2@3404.99,2906.58
NetC59B_2: C59B.2 R50B.2 U12B.13 U12B.14 | length 190.2
  TopLayer w6.5: v1(3384.94,1386.11) 3384.94,1412.62 ; U12B.13@3384.94,1439.63 3384.94,1412.62 ; U12B.14@3404.62,1439.63 3404.62,1419.62 3397.62,1412.62 3384.94,1412.62
  BottomLayer w6.5: C59B.2@3358.87,1353.58 3358.87,1368.51 3376.47,1386.11 v1(3384.94,1386.11) 3392.89,1386.11 3404.99,1374.01 3404.99,1354.21 R50B.2@3404.36,1353.58
NetC61A_1: C61A.1 C62A.2 L10A.2@3632.29,3069.01 R51A.2 Rfb1A.1 U12A.3 | length 962.3
  TopLayer w6.5: U12A.3@3404.62,3110.12 v1(3404.62,3162.64) ; v1(3585,3005) 3585,2954.52 C61A.1@3594.11,2945.41
  TopLayer w30: v6@3685,2933.28 3606.24,2933.28 C61A.1@3594.11,2945.41 3623.7,2975 v6(3685,2975)
  TopLayer w40: C61A.1@3623.7,2975 3632.29,2983.59 L10A.2@3632.29,3069.01
  MidLayer4 w10: v1(3404.62,3162.64) 3491.63,3162.64 3585,3069.26 v1(3585,3005)
  BottomLayer w6.5: Rfb1A.1@3491.99,2914.01 3491.99,2958.64 3492.36,2959.01 3564.01,2959.01 3585,2980 v1(3585,3005)
  BottomLayer w30: R51A.2@3685,2880 3685,2933.28 v6(3685,2975)
  other v6: 3685,2932.28
NetC61B_1: C61B.1 C62B.2 L10B.2@3632.29,1516.63 R51B.2 Rfb1B.1 U12B.3 | length 958.7
  TopLayer w6.5: U12B.3@3404.62,1557.74 v1(3404.62,1611.26) ; v1@3585,1447.62 3585,1402.14 C61B.1@3594.11,1393.03
  TopLayer w30: v6@3685,1380.9 3606.24,1380.9 C61B.1@3594.11,1393.03 3623.7,1422.62 v6(3685,1422.62)
  TopLayer w40: C61B.1@3623.7,1422.62 3632.29,1431.21 L10B.2@3632.29,1516.63
  MidLayer4 w10: v1(3404.62,1611.26) 3490.63,1611.26 3585,1516.89 v1(3585,1451.62)
  BottomLayer w6.5: Rfb1B.1@3491.99,1361.63 3491.99,1406.26 3492.36,1406.63 3564.01,1406.63 3585,1427.62 v1(3585,1451.62)
  BottomLayer w30: R51B.2@3685,1327.62 v6(3685,1422.62)
  other v6: 3685,1379.9
NetC62A_1: C62A.1 Rfb1A.2 Rfb3A.1 U12A.10 | length 450.7
  TopLayer w6.5: v1(3262.52,3021.54) U12A.10@3316.04,3021.54
  MidLayer4 w10: v1(3262.52,3021.54) 3261,3020.02 3261,2961.54 3342.54,2880 v1(3440,2880)
  BottomLayer w6.5: v1(3262.52,3021.54) 3288.46,3021.54 Rfb3A.1@3297.99,3012.01 ; v1(3440,2880) 3452.62,2892.62 3452.62,2958.64 C62A.1@3452.99,2959.01
NetC62B_1: C62B.1 Rfb1B.2 Rfb3B.1 U12B.10 | length 447.7
  TopLayer w6.5: v1(3262.52,1469.16) U12B.10@3313.04,1469.16
  MidLayer4 w10: v1(3262.52,1469.16) 3261,1467.64 3261,1409.16 3342.54,1327.62 v1(3440,1327.62)
  BottomLayer w6.5: v1(3262.52,1469.16) 3288.46,1469.16 Rfb3B.1@3297.99,1459.63 ; v1(3440,1327.62) 3452.62,1340.24 3452.62,1406.26 C62B.1@3452.99,1406.63
NetC65B_2: C65B.2 R53B.1 R54B.1 U12B.2 U12B.9 | length 566.3
  TopLayer w6.5: v1(3283.02,1488.84) U12B.9@3313.04,1488.84 ; U12B.2@3424.31,1557.74 v1(3424.31,1590.76)
  MidLayer4 w10: v1(3283.02,1488.84) 3298.84,1488.84 3342.62,1532.62 3390,1532.62 3424.31,1566.93 v1(3424.31,1590.76)
  BottomLayer w6.5: R54B.1@3270.99,1363.63 3248.99,1363.63 3240,1372.62 3240,1474.96 3253.88,1488.84 v1(3283.02,1488.84) ; v1@3423.99,1588.07 R53B.1@3423.99,1640.26 3441.62,1622.63 C65B.2@3483.99,1622.63 ; v1@3423.99,1591.07 v1(3424.31,1590.76)
NetC66A_2: C66A.2 R54A.2 R61A.1 U12A.11 | length 188.8
  TopLayer w6.5: v1(3345.57,2937.49) U12A.11@3345.57,2992.01
  BottomLayer w6.5: R61A.1@3309.99,2870.01 3309.99,2940 ; C66A.2@3309.99,2962.01 3309.99,2940 ; v1@3341.57,2941.49 v1(3345.57,2937.49) 3312.5,2937.49 3309.99,2940
NetC66B_2: C66B.2 R54B.2 R61B.1 U12B.11 | length 186
  TopLayer w6.5: v1(3345.57,1386.11) U12B.11@3345.57,1439.63
  BottomLayer w6.5: R61B.1@3309.99,1317.63 3309.99,1387.62 ; C66B.2@3309.99,1409.63 3309.99,1387.62 ; v1@3342.57,1389.11 v1(3345.57,1386.11) 3311.5,1386.11 3309.99,1387.62
NetC67A_1: C67A.1 R61A.2 | length 127.6
  BottomLayer w6.5: R61A.2@3270.62,2870.01 3270.62,2841.26 3300.99,2810.89 C67A.1@3300.99,2755.01
NetC67B_1: C67B.1 R61B.2 | length 127.6
  BottomLayer w6.5: R61B.2@3270.62,1317.63 3270.62,1288.88 3300.99,1258.51 C67B.1@3300.99,1202.63
NetC68A_1: C68A.1 R63A.1 U12A.7 | length 140.5
  TopLayer w6.5: v1(3283.02,3080.59) U12A.7@3316.04,3080.59
  BottomLayer w6.5: v1@3281.99,3081.62 v1(3283.02,3080.59) ; R63A.1@3284.99,3120.01 3283.02,3118.04 v1(3283.02,3080.59) ; C68A.1@3341.99,3097.01 3325.57,3080.59 v1(3283.02,3080.59)
NetC68B_1: C68B.1 R63B.1 U12B.7 | length 133.2
  TopLayer w6.5: v1(3283.02,1528.21) U12B.7@3313.04,1528.21
  BottomLayer w6.5: v1@3281.99,1529.24 v1(3283.02,1528.21) ; R63B.1@3284.99,1567.63 3284.99,1529.24 3326.6,1529.24 C68B.1@3341.99,1544.63
NetC69A_1: C69A.1 R65A.1 U12A.8 | length 339.8
  TopLayer w6.5: v1(3262.52,3060.91) U12A.8@3316.04,3060.91
  BottomLayer w6.5: v1(3262.52,3060.91) 3252.5,3070.92 3252.5,3231.36 3265.52,3244.38 R65A.1@3285.99,3244.38 3285.99,3279.01 C69A.1@3312.99,3306.01
NetC69B_1: C69B.1 R65B.1 U12B.8 | length 336.8
  TopLayer w6.5: v1(3262.52,1508.53) U12B.8@3313.04,1508.53
  BottomLayer w6.5: v1(3262.52,1508.53) 3252.5,1518.54 3252.5,1678.98 3265.52,1692 R65B.1@3285.99,1692 3285.99,1726.63 C69B.1@3312.99,1753.63
NetC97A_2: C97A.2 C98A.2 R20A.1 U5A.15 | length 253.9
  TopLayer w6.5: C97A.2@1219.11,5158.65 1207.11,5146.65 R20A.1@1207.11,5103.02 1215.54,5111.45 U5A.15@1279.11,5111.45 ; U5A.15@1281.11,5113.45 U5A.15@1279.11,5111.45 ; v1(1344.28,5111.45) U5A.15@1279.11,5111.45
  BottomLayer w6.5: C98A.2@1299.11,5122.65 1310.31,5111.45 v1(1344.28,5111.45)
NetC97B_2: C97B.2 C98B.2 R20B.1 U5B.15 | length 253.9
  TopLayer w6.5: C97B.2@1218.86,4691.99 1206.86,4679.99 R20B.1@1206.86,4636.36 1215.29,4644.79 U5B.15@1278.86,4644.79 ; U5B.15@1280.86,4646.79 U5B.15@1278.86,4644.79 ; v1(1344.03,4644.79) U5B.15@1278.86,4644.79
  BottomLayer w6.5: C98B.2@1298.86,4655.99 1310.06,4644.79 v1(1344.03,4644.79)
NetC97C_2: C97C.2 C98C.2 R20C.1 U5C.15 | length 253.9
  TopLayer w6.5: C97C.2@1219.31,3214.02 1207.31,3202.02 R20C.1@1207.31,3158.39 1215.74,3166.82 U5C.15@1279.31,3166.82 ; U5C.15@1281.31,3168.82 U5C.15@1279.31,3166.82 ; v1(1344.48,3166.82) U5C.15@1279.31,3166.82
  BottomLayer w6.5: C98C.2@1299.31,3178.02 1310.51,3166.82 v1(1344.48,3166.82)
NetC97D_2: C97D.2 C98D.2 R20D.1 U5D.15 | length 253.9
  TopLayer w6.5: C97D.2@1219.92,3681.99 1207.92,3669.99 R20D.1@1207.92,3626.36 1216.35,3634.79 U5D.15@1279.92,3634.79 ; U5D.15@1281.92,3636.79 U5D.15@1279.92,3634.79 ; v1(1345.09,3634.79) U5D.15@1279.92,3634.79
  BottomLayer w6.5: C98D.2@1299.92,3645.99 1311.12,3634.79 v1(1345.09,3634.79)
NetC97E_2: C97E.2 C98E.2 R20E.1 U5E.15 | length 253.9
  TopLayer w6.5: C97E.2@1675.61,2426.34 1663.61,2414.34 R20E.1@1663.61,2370.71 1672.04,2379.14 U5E.15@1735.61,2379.14 ; U5E.15@1737.61,2381.14 U5E.15@1735.61,2379.14 ; v1(1800.78,2379.14) U5E.15@1735.61,2379.14
  BottomLayer w6.5: C98E.2@1755.61,2390.34 1766.81,2379.14 v1(1800.78,2379.14)
NetC97F_2: C97F.2 C98F.2 R20F.1 U5F.15 | length 253.9
  TopLayer w6.5: C97F.2@1676,1958.63 1664,1946.63 R20F.1@1664,1903 1672.43,1911.43 U5F.15@1736,1911.43 ; U5F.15@1738,1913.43 U5F.15@1736,1911.43 ; v1(1801.17,1911.43) U5F.15@1736,1911.43
  BottomLayer w6.5: C98F.2@1756,1922.63 1767.2,1911.43 v1(1801.17,1911.43)
NetC97G_2: C97G.2 C98G.2 R20G.1 U5G.15 | length 253.9
  TopLayer w6.5: C97G.2@1675.61,479.63 1663.61,467.63 R20G.1@1663.61,424 1672.04,432.43 U5G.15@1735.61,432.43 ; U5G.15@1737.61,434.43 U5G.15@1735.61,432.43 ; v1(1800.78,432.43) U5G.15@1735.61,432.43
  BottomLayer w6.5: C98G.2@1755.61,443.63 1766.81,432.43 v1(1800.78,432.43)
NetC97H_2: C97H.2 C98H.2 R20H.1 U5H.15 | length 253.9
  TopLayer w6.5: C97H.2@1675.61,946.34 1663.61,934.34 R20H.1@1663.61,890.71 1672.04,899.14 U5H.15@1735.61,899.14 ; U5H.15@1737.61,901.14 U5H.15@1735.61,899.14 ; v1(1800.78,899.14) U5H.15@1735.61,899.14
  BottomLayer w6.5: C98H.2@1755.61,910.34 1766.81,899.14 v1(1800.78,899.14)
NetC104_2: C104.2 R62.2 R68.1 U14.1 | length 266.8
  TopLayer w6.5: R62.2@3583,3409.84 3583,3433.79 3591.58,3442.37 U14.1@3591.58,3468.87 v1(3641.43,3468.87)
  BottomLayer w6.5: C104.2@3486.98,3478.24 R68.1@3532.98,3478.24 3540.74,3478.24 3550.11,3468.87 v1@3637.43,3468.87
NetDP1_1: DP1.1 R48.2 | length 55
  TopLayer w6.5: DP1.1@3600.4,2494.82 3605.58,2500 R48.2@3653.3,2500
NetIn2_1: In2.1 L13.2 R76.2 | length 255.4
  TopLayer w30: In2.1@3491,4186.42 3556.91,4186.42 3592.3,4151.03 L13.2@3592.3,4079.82
  BottomLayer w30: In2.1@3491,4186.42 R76.2@3559.27,4186.42
NetIoutA1A_1: IoutA1A.1 R30A.1 U5A.20 | length 369.6
  TopLayer w6.5: R30A.1@1124.48,4766.45 1128.28,4762.65 IoutA1A.1@1178.28,4762.65 ; IoutA1A.1@1183.31,4766.45 1174.48,4766.45 IoutA1A.1@1178.28,4762.65 ; IoutA1A.1@1184.69,4756.23 1182.69,4758.23 IoutA1A.1@1178.28,4762.65 ; IoutA1A.1@1187.11,4762.65 IoutA1A.1@1178.28,4762.65 ; IoutA1A.1@1193.11,4762.65 1217.11,4786.65 1217.11,4965.37 1232.58,4980.85 1276.51,4980.85 U5A.20@1279.11,4983.45
NetIoutA1B_1: IoutA1B.1 R30B.1 U5B.20 | length 369.6
  TopLayer w6.5: R30B.1@1124.23,4299.79 1128.03,4295.99 IoutA1B.1@1178.03,4295.99 ; IoutA1B.1@1183.06,4299.79 1174.23,4299.79 IoutA1B.1@1178.03,4295.99 ; IoutA1B.1@1184.45,4289.57 1182.45,4291.57 IoutA1B.1@1178.03,4295.99 ; IoutA1B.1@1186.86,4295.99 IoutA1B.1@1178.03,4295.99 ; IoutA1B.1@1192.86,4295.99 1216.86,4319.99 1216.86,4498.71 1232.34,4514.19 1276.26,4514.19 U5B.20@1278.86,4516.79
NetIoutA1C_1: IoutA1C.1 R30C.1 U5C.20 | length 369.6
  TopLayer w6.5: R30C.1@1124.68,2821.82 1128.48,2818.02 IoutA1C.1@1178.48,2818.02 ; IoutA1C.1@1183.51,2821.82 1174.68,2821.82 IoutA1C.1@1178.48,2818.02 ; IoutA1C.1@1184.9,2811.6 1182.9,2813.6 IoutA1C.1@1178.48,2818.02 ; IoutA1C.1@1187.31,2818.02 IoutA1C.1@1178.48,2818.02 ; IoutA1C.1@1193.31,2818.02 1217.31,2842.02 1217.31,3020.74 1232.78,3036.22 1276.71,3036.22 U5C.20@1279.31,3038.82
NetIoutA1D_1: IoutA1D.1 R30D.1 U5D.20 | length 369.6
  TopLayer w6.5: R30D.1@1125.29,3289.79 1129.09,3285.99 IoutA1D.1@1179.09,3285.99 ; IoutA1D.1@1184.12,3289.79 1175.29,3289.79 IoutA1D.1@1179.09,3285.99 ; IoutA1D.1@1185.51,3279.57 1183.51,3281.57 IoutA1D.1@1179.09,3285.99 ; IoutA1D.1@1187.92,3285.99 IoutA1D.1@1179.09,3285.99 ; IoutA1D.1@1193.92,3285.99 1217.92,3309.99 1217.92,3488.71 1233.4,3504.19 1277.32,3504.19 U5D.20@1279.92,3506.79
NetIoutA1E_1: IoutA1E.1 R30E.1 U5E.20 | length 369.6
  TopLayer w6.5: R30E.1@1580.98,2034.14 1584.78,2030.34 IoutA1E.1@1634.78,2030.34 ; IoutA1E.1@1639.81,2034.14 1630.98,2034.14 IoutA1E.1@1634.78,2030.34 ; IoutA1E.1@1641.2,2023.92 1639.2,2025.92 IoutA1E.1@1634.78,2030.34 ; IoutA1E.1@1643.61,2030.34 IoutA1E.1@1634.78,2030.34 ; IoutA1E.1@1649.61,2030.34 1673.61,2054.34 1673.61,2233.07 1689.09,2248.54 1733.01,2248.54 U5E.20@1735.61,2251.14
NetIoutA1F_1: IoutA1F.1 R30F.1 U5F.20 | length 369.6
  TopLayer w6.5: R30F.1@1581.37,1566.43 1585.17,1562.63 IoutA1F.1@1635.17,1562.63 ; IoutA1F.1@1640.2,1566.43 1631.37,1566.43 IoutA1F.1@1635.17,1562.63 ; IoutA1F.1@1641.59,1556.21 1639.59,1558.21 IoutA1F.1@1635.17,1562.63 ; IoutA1F.1@1644,1562.63 IoutA1F.1@1635.17,1562.63 ; IoutA1F.1@1650,1562.63 1674,1586.63 1674,1765.36 1689.47,1780.83 1733.4,1780.83 U5F.20@1736,1783.43
NetIoutA1G_1: IoutA1G.1 R30G.1 U5G.20 | length 369.6
  TopLayer w6.5: R30G.1@1580.98,87.43 1584.78,83.63 IoutA1G.1@1634.78,83.63 ; IoutA1G.1@1639.81,87.43 1630.98,87.43 IoutA1G.1@1634.78,83.63 ; IoutA1G.1@1641.2,77.22 1639.2,79.22 IoutA1G.1@1634.78,83.63 ; IoutA1G.1@1643.61,83.63 IoutA1G.1@1634.78,83.63 ; IoutA1G.1@1649.61,83.63 1673.61,107.63 1673.61,286.36 1689.09,301.83 1733.01,301.83 U5G.20@1735.61,304.43
NetIoutA1H_1: IoutA1H.1 R30H.1 U5H.20 | length 369.6
  TopLayer w6.5: R30H.1@1580.98,554.14 1584.78,550.34 IoutA1H.1@1634.78,550.34 ; IoutA1H.1@1639.81,554.14 1630.98,554.14 IoutA1H.1@1634.78,550.34 ; IoutA1H.1@1641.2,543.92 1639.2,545.92 IoutA1H.1@1634.78,550.34 ; IoutA1H.1@1643.61,550.34 IoutA1H.1@1634.78,550.34 ; IoutA1H.1@1649.61,550.34 1673.61,574.34 1673.61,753.07 1689.09,768.54 1733.01,768.54 U5H.20@1735.61,771.14
NetIoutB1A_1: IoutB1A.1 R22A.2 U5A.19 | length 281
  TopLayer w6.5: R22A.2@1109.48,5135.65 1113.48,5139.65 IoutB1A.1@1162.11,5139.65 1176.11,5125.65 1176.11,5030.65 1195.11,5011.65 1276.51,5011.65 U5A.19@1279.11,5009.05
NetIoutB1B_1: IoutB1B.1 R22B.2 U5B.19 | length 281
  TopLayer w6.5: R22B.2@1109.23,4668.99 1113.23,4672.99 IoutB1B.1@1161.86,4672.99 1175.86,4658.99 1175.86,4563.99 1194.86,4544.99 1276.26,4544.99 U5B.19@1278.86,4542.39
NetIoutB1C_1: IoutB1C.1 R22C.2 U5C.19 | length 281
  TopLayer w6.5: R22C.2@1109.68,3191.02 1113.68,3195.02 IoutB1C.1@1162.31,3195.02 1176.31,3181.02 1176.31,3086.02 1195.31,3067.02 1276.71,3067.02 U5C.19@1279.31,3064.42
NetIoutB1D_1: IoutB1D.1 R22D.2 U5D.19 | length 281
  TopLayer w6.5: R22D.2@1110.29,3658.99 1114.29,3662.99 IoutB1D.1@1162.92,3662.99 1176.92,3648.99 1176.92,3553.99 1195.92,3534.99 1277.32,3534.99 U5D.19@1279.92,3532.39
NetIoutB1E_1: IoutB1E.1 R22E.2 U5E.19 | length 281
  TopLayer w6.5: R22E.2@1565.98,2403.34 1569.98,2407.34 IoutB1E.1@1618.61,2407.34 1632.61,2393.34 1632.61,2298.34 1651.61,2279.34 1733.01,2279.34 U5E.19@1735.61,2276.74
NetIoutB1F_1: IoutB1F.1 R22F.2 U5F.19 | length 281
  TopLayer w6.5: R22F.2@1566.37,1935.63 1570.37,1939.63 IoutB1F.1@1619,1939.63 1633,1925.63 1633,1830.63 1652,1811.63 1733.4,1811.63 U5F.19@1736,1809.03
NetIoutB1G_1: IoutB1G.1 R22G.2 U5G.19 | length 281
  TopLayer w6.5: R22G.2@1565.98,456.63 1569.98,460.63 IoutB1G.1@1618.61,460.63 1632.61,446.63 1632.61,351.63 1651.61,332.63 1733.01,332.63 U5G.19@1735.61,330.03
NetIoutB1H_1: IoutB1H.1 R22H.2 U5H.19 | length 281
  TopLayer w6.5: R22H.2@1565.98,923.34 1569.98,927.34 IoutB1H.1@1618.61,927.34 1632.61,913.34 1632.61,818.34 1651.61,799.34 1733.01,799.34 U5H.19@1735.61,796.74
NetIp2_1: Ip2.1 L12.1 R71.2 | length 253.9
  TopLayer w30: Ip2.1@3250.38,2384 3305,2384 3352.04,2336.96 L12.1@3352.04,2276.67
  BottomLayer w30: Ip2.1@3250.38,2384 3321.38,2384 R71.2@3322.38,2385
NetIp4_1: Ip4.1 L9.1 R77.2 | length 258.6
  TopLayer w30: Ip4.1@3232,4189.42 3306.58,4189.42 3335.65,4160.35 L9.1@3335.65,4083.09
  BottomLayer w30: Ip4.1@3232,4189.42 R77.2@3297.65,4189.42
NetJ2_38: J2.38 J2.39 R55.2
NetP1_C35: P1.C35 P1.C37 R74.1 | length 702.5
  TopLayer w6.5: v4(2761.34,4734.33) P1.C35@2786.34,4709.33 ; v4(2761.34,4784.33) P1.C37@2786.34,4809.33
  TopLayer w30: v6(2760.35,5246) R74.1@2810,5246
  BottomLayer w12: v4(2761.34,4734.33) v4(2761.34,4784.33) 2786.01,4809 2786.01,4954
  BottomLayer w20: 2786.01,4954 2786.01,4983.01
  BottomLayer w30: v6(2760.35,5246) 2793,5246 2820,5219 2820,5009 2790,4979
NetP1_D30: P1.D30 P1.D31 | length 50
  TopLayer w4.5: P1.D30@2736.34,4459.33 P1.D31@2736.34,4509.33
NetP1_E39: P1.E39 P1.F40 P1.G39 P1.H40 P1.J39 P1.K40 R73.1 | length 812
  TopLayer w8: P1.K40@2436.34,4959.33 v4(2461.34,4934.33) P1.J39@2486.34,4909.33 ; P1.H40@2536.34,4959.33 v4(2561.34,4934.33) P1.G39@2586.34,4909.33 ; P1.F40@2636.34,4959.33 v4(2661.34,4934.33) P1.E39@2686.34,4909.33
  TopLayer w30: v6(2760.35,5151) R73.1@2810,5151
  BottomLayer w20: v4(2461.34,4934.33) 2492.01,4965 2561,4965 ; v4(2561.34,4934.33) 2561.34,4964.66 2561,4965 ; v4(2661.34,4934.33) 2630.67,4965 2561,4965
  BottomLayer w30: 2561,4965 2561,4995 2600.85,5034.85 2644.2,5034.85 v6(2760.35,5151)
NetR1A_1: R1A.1 R3A.2 U2A.8 | length 151.4
  TopLayer w6.5: U2A.8@573.49,4132.93 R1A.1@654.11,4132.93 ; U2A.8@573.49,4133.49 573.49,4152.43 594.11,4173.05 R3A.2@594.11,4195.77
NetR1A_2: R1A.2 R2A.1 U2A.5 | length 186.7
  TopLayer w6.5: U2A.5@573.49,4056.16 634.59,4056.16 654.11,4075.68 R1A.2@654.11,4091.68 672.74,4091.68 705.54,4124.49 R2A.1@722.51,4124.49